# Altium PCB USB_IsolatorPCB.PcbDoc
Units mm, origin at the board's own origin, x right, y up, seen from the top; angles counter-clockwise.
Board outline 52.71 x 63.5 mm, 2 copper layers (Top Layer, Bottom Layer); 21 components, 16 nets, 82 pads, 26 vias.
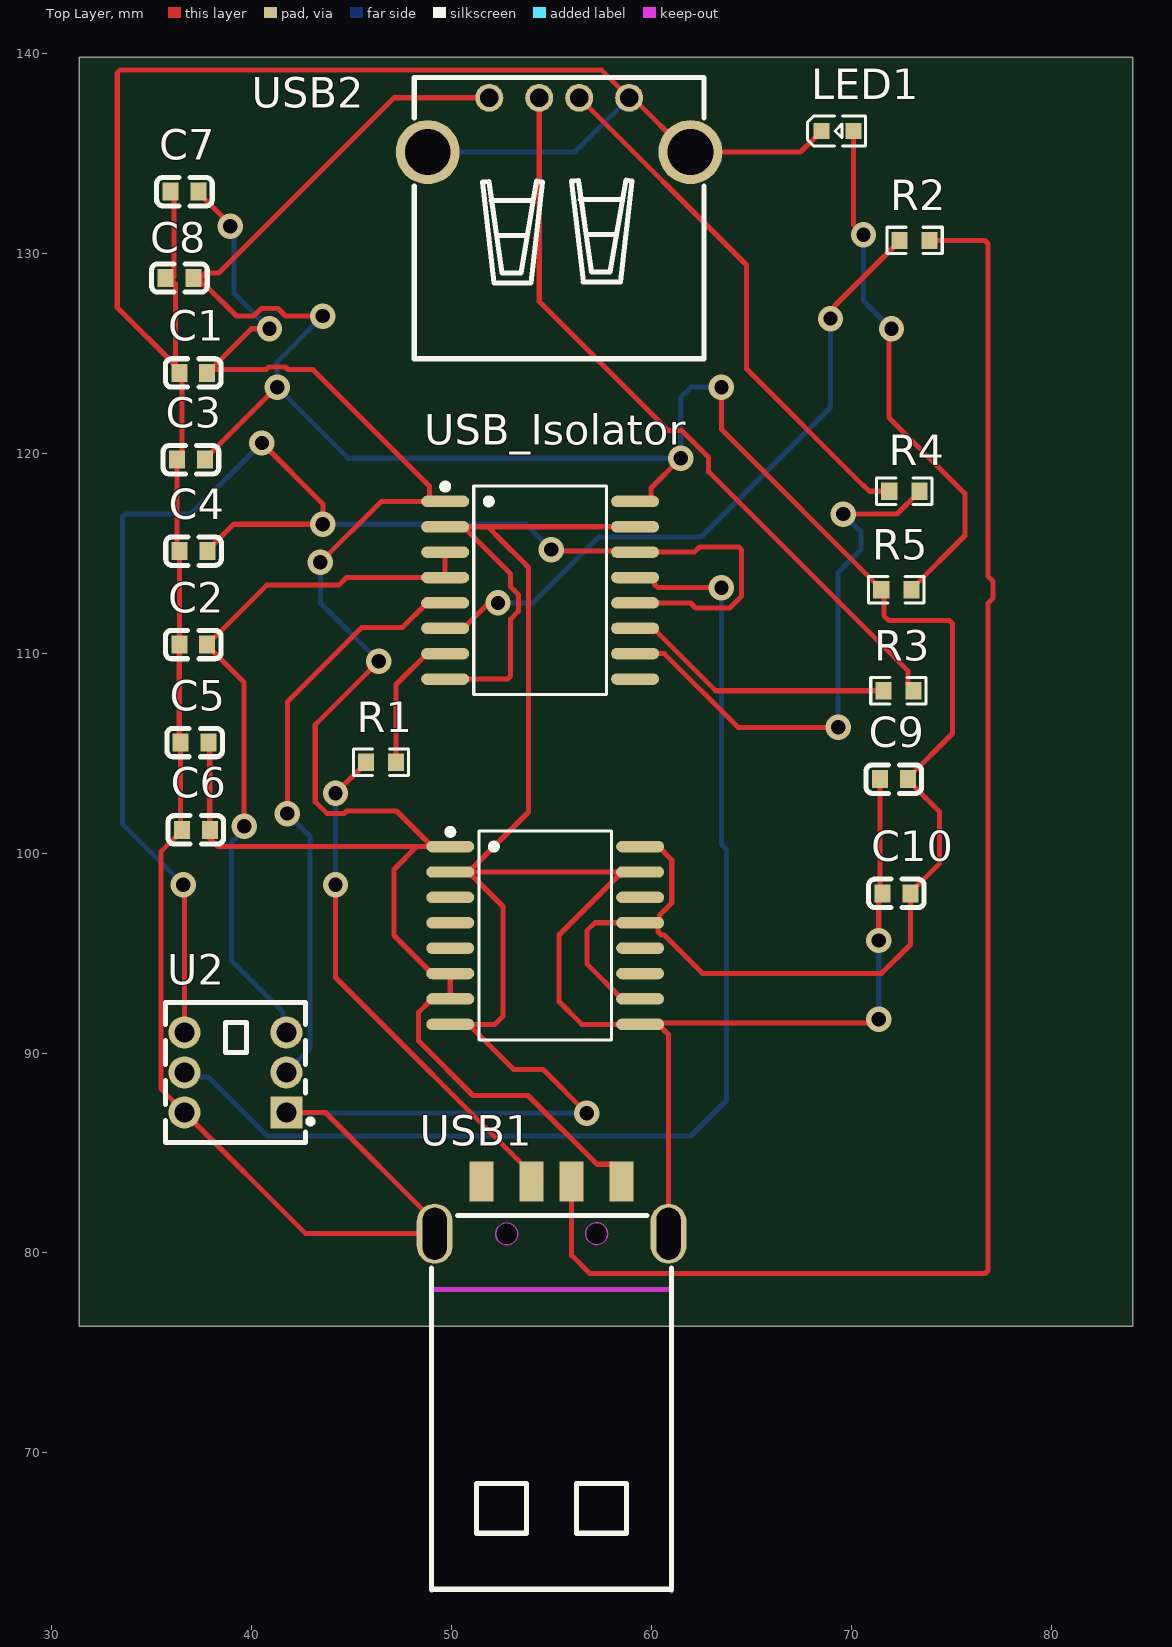
[diagram p0: Top Layer view]
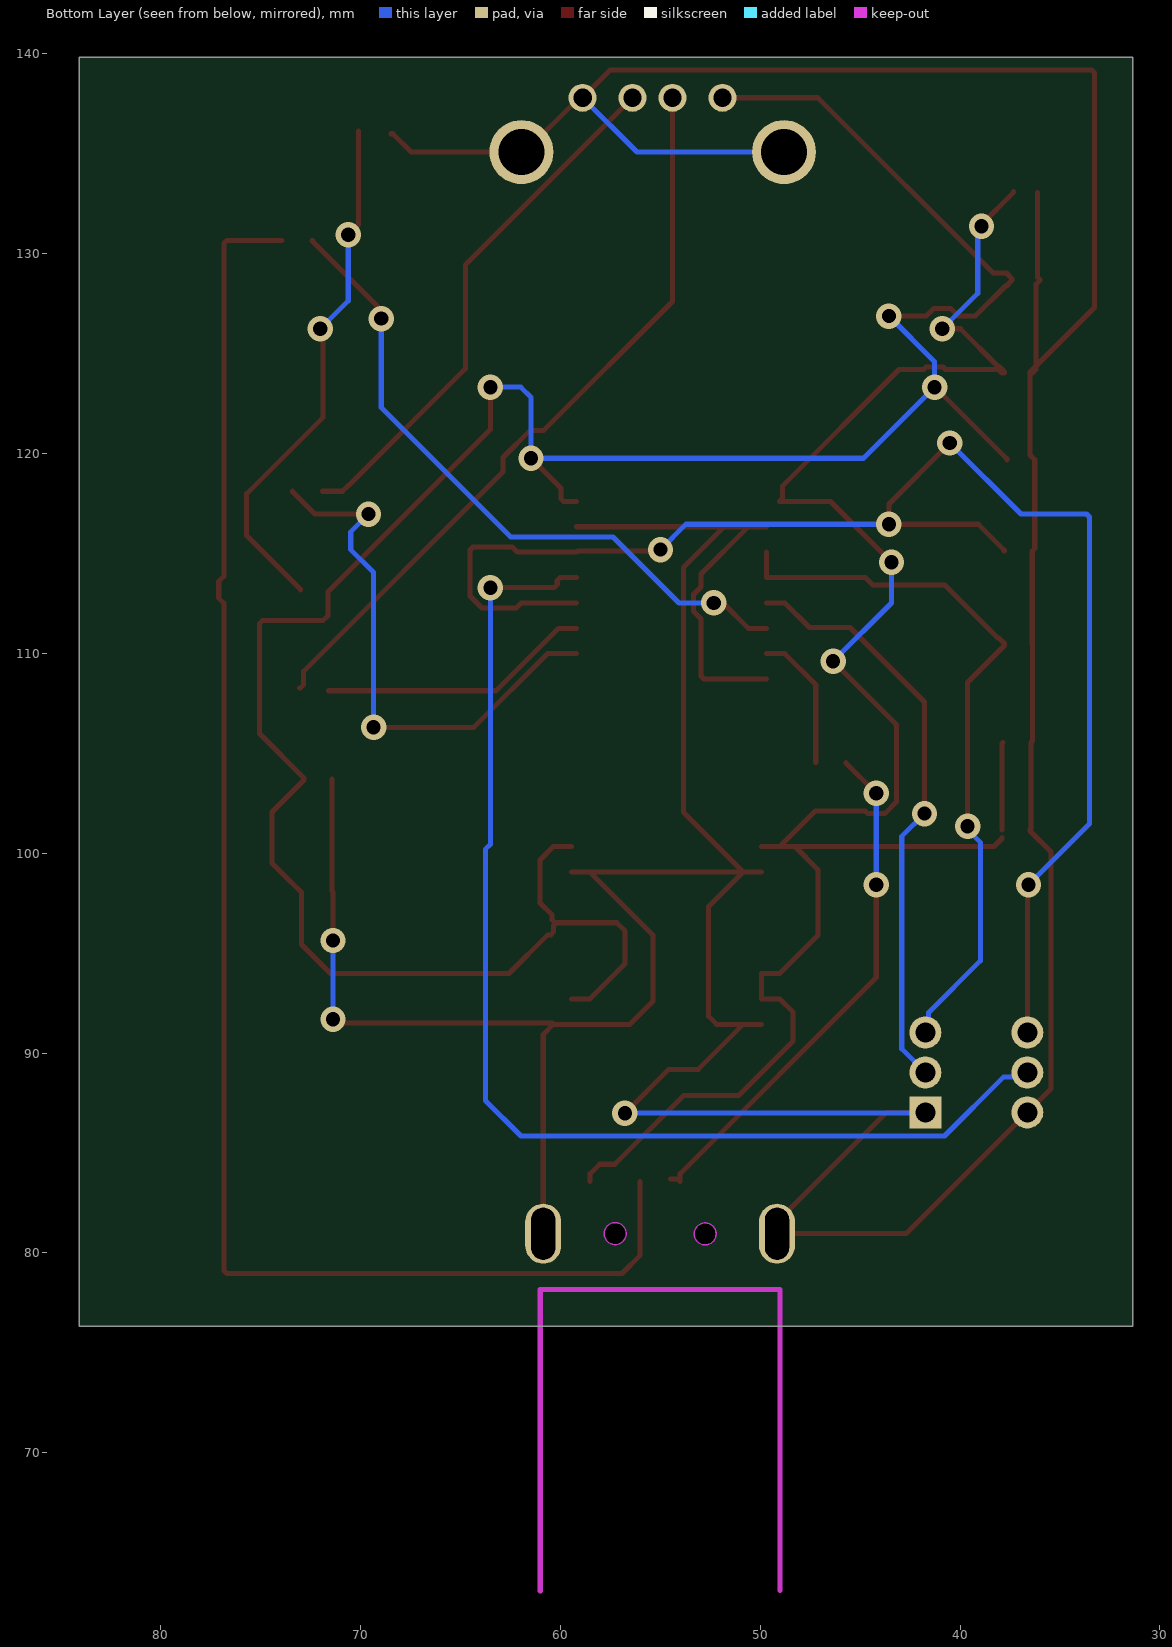
[diagram p1: Bottom Layer view, seen from below]
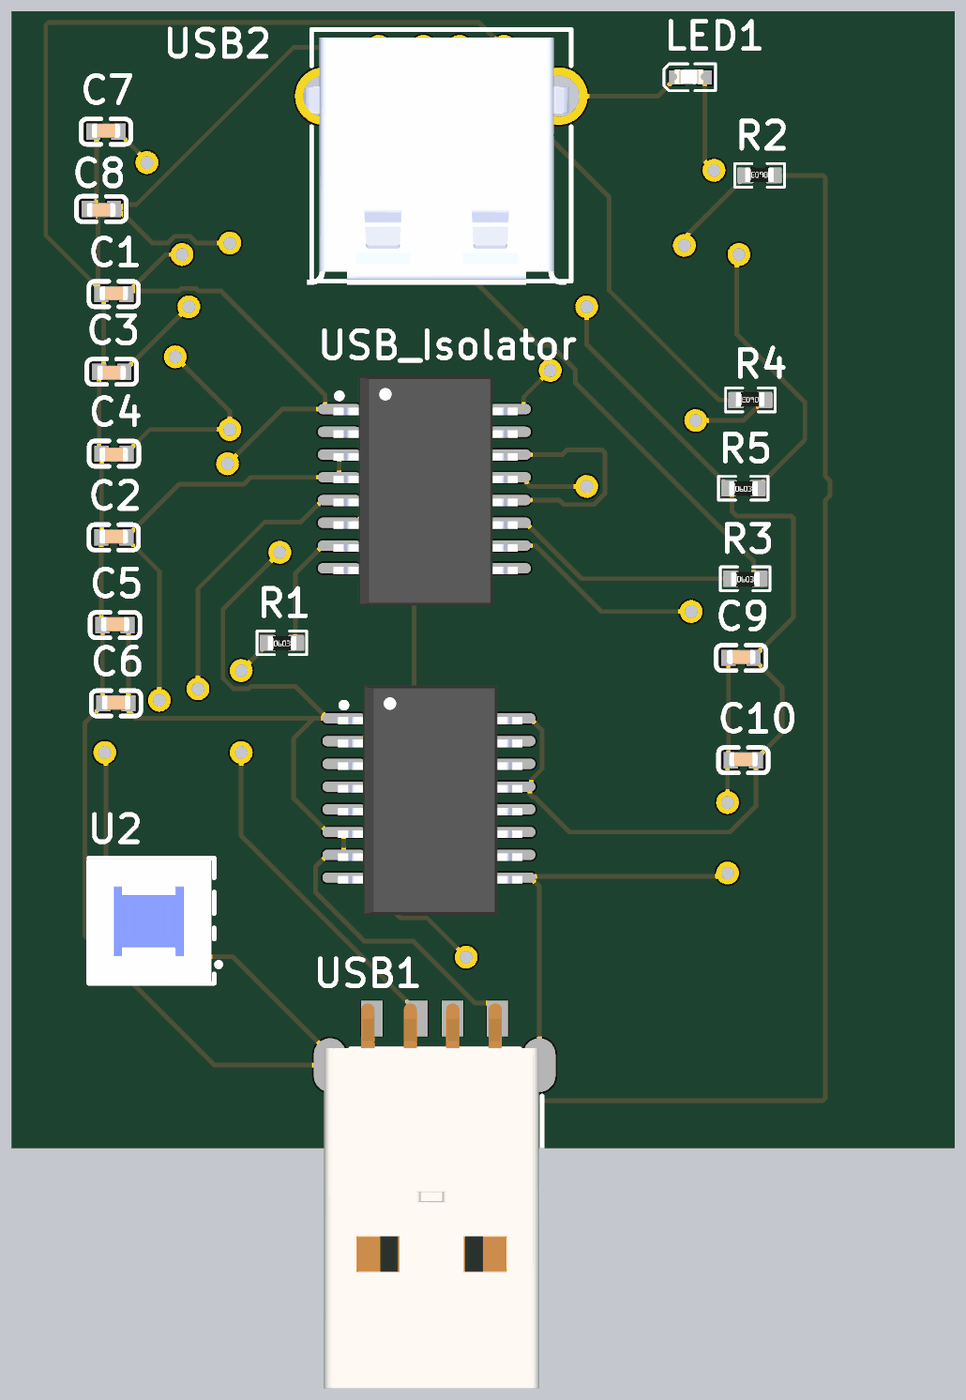
[diagram p2: 3D render of the assembled board from above, using the file's embedded part models]

## Layer stack, top to bottom
Top Solder: solder mask 0.0102, Solder Resist, Dk 3.5
Top Layer: signal copper 0.0356
Dielectric 1: dielectric 0.32, FR-4, Dk 4.8
Bottom Layer: signal copper 0.0356
Bottom Solder: solder mask 0.0102, Solder Resist, Dk 3.5

## Board outline
31.369,76.327 31.369,139.827 84.074,139.827 84.074,76.327

## Design rules (kind name [scope] priority, off if disabled: settings)
Clearance [All] p1: gap=0.254 ignorepadtopadclearanceinfootprint=FALSE
PolygonConnect [All] p1: connectstyle=Relief reliefconductorwidth=0.254 reliefentries=4 polygonreliefangle="90 Angle" airgapwidth=0.254
RoutingVias [All] p1: holewidth=0.711 width=1.27 viastyle="Through Hole" minholewidth=0.711 minwidth=1.27 maxholewidth=0.711 maxwidth=1.27
SolderMaskExpansion [All] p1: expansion=0.102 istentingtop=FALSE
SupplyNets "Schematic Supply Nets_2" [InNet('VCC')] p1: voltage=0.000
SupplyNets "Schematic Supply Nets_1" [InNet('AVCC')] p2: voltage=0.000
SupplyNets "Schematic Supply Nets" [InNet('AGND')] p3: voltage=0.000
Width [All] p1: maxlimit=0.254 minlimit=0.254 preferedwidth=0.254
30 further rules are at their usual default settings.

## Classes and differential pairs
component class USB_Isolator: C1 C2 C3 C5 C6 C7 C8 C9 C10 LED1 R1 R2 R3 R5 U2 USB2

## Components (designator, comment, footprint, x,y, rotation, side; value= is the part's Value field where it differs from the comment)
C1 "100nF" 100uF 37.084,124.079 r0 top
C2 "100nF" 100uF 37.084,110.49 r0 top
C3 "100nF" 100uF 36.957,119.634 r180 top
C4 "100nF" 100uF 37.084,115.062 r180 top
C5 "100nF" 100uF 37.156,105.589 r0 top
C6 "100nF" 100uF 37.211,101.219 r0 top
C7 "100nF" 100uF 36.645,133.148 r0 top
C8 "100nF" 100uF 36.38,128.726 r180 top
C9 "100nF" 100uF 72.136,103.759 r0 top
C10 "100nF" 100uF 72.263,98.044 r0 top
LED1 "XL-1608SURC-06" LED 69.342,136.144 r0 top
R1 "10Ω" 100K 46.482,104.521 r0 top
R2 "10Ω" 100K 73.152,130.683 r180 top
R3 "10Ω" 100K 72.369,108.103 r0 top
R4 "10Ω" 100K 72.641,118.136 r180 top
R5 "10Ω" 100K 72.263,113.157 r0 top
U2 "KFC7070-Z" Switch 39.116,89.027 r0 top
U? "ADUM4160BRWZ-RL" "USB ISOLATOR" 49.935,100.33 r270 top
USB1 "480372100" "USB MALE" 58.508,83.693 r0 top (schematic designator USB?)
USB2 "UE27AC54100" "USB TYPE- A" 51.887,137.795 r0 top
USB_Isolator "ADUM4160BRWZ-RL" "USB ISOLATOR" 49.681,117.602 r270 top

## Footprints (in the part's own frame and the unit in brackets; to place one, negate y for a bottom-side part, rotate by r counter-clockwise, add the part's x,y. Pads: shape width x height; smd on the part's side, far side on the other; paste and mask are expansions set on the pad)
100K [mm]
  rect 0.806x0.864 smd paste-100 mask+0.051: 1(-0.765,0.026) 2(0.741,0.026)
  silkscreen extent -1.4,-0.64 1.37,0.69, body extent -0.8,-0.4 0.8,0.4, height 0.47
100uF [mm]
  rect 0.8x0.9 smd: 1(-0.707,-0.052) 2(0.693,-0.052)
  silkscreen extent -1.4,-0.76 1.38,0.66, body extent -0.8,-0.4 0.8,0.4, height 0.8
LED [mm]
  rect 0.8x0.8 smd: 1(-0.834,-0.02) 2(0.765,-0.013)
  silkscreen extent -1.52,-0.76 1.36,0.74, body extent -0.94,-0.38 0.68,0.42, height 0.63
Switch [mm]
  rect 1.6x1.6 hole 1 paste-2539.97 mask+0.05: 1(2.621,-1.996)
  round 1.6 hole 1 paste-2539.97 mask+0.05: 2(2.621,0.004) 3(2.621,2.004) 4(-2.479,-1.996) 5(-2.479,0.004) 6(-2.479,2.004)
  silkscreen extent -3.43,-3.5 3.95,3.5, body extent -3.59,-3.53 3.41,3.47, height 12.4
"USB ISOLATOR" [mm]
  oval 0.574x2.401 smd: 1(0,0) 2(1.27,0) 3(2.54,0) 4(3.81,0) 5(5.08,0) 6(6.35,0) 7(7.62,0) 8(8.89,0) 9(8.89,9.501) 10(7.62,9.501) 11(6.35,9.501) 12(5.08,9.501) 13(3.81,9.501) 14(2.54,9.501) 15(1.27,9.501) 16(0,9.501)
  silkscreen extent -0.89,-0.15 9.67,8.07, body extent -1.83,-0.32 10.97,9.98, height 2.64
"USB MALE" [mm]
  rect 1.2x2 smd paste-100 mask+0.051: 1(0,-0.127) 2(-2.501,-0.127) 3(-4.5,-0.127) 4(-7,-0.127)
  oval 1.8x3 hole 1.2 slot 2.6 at 90 deg: 5(-9.35,-2.727) 6(2.349,-2.727)
  Keep-Out Layer board cut-out: -0.7,-2.726 -0.755,-2.965 -0.908,-3.156 -1.128,-3.263 -1.373,-3.263 -1.593,-3.156 -1.746,-2.965 -1.8,-2.726 -1.8,-2.726 -1.746,-2.488 -1.593,-2.296 -1.373,-2.19 -1.128,-2.19 -0.908,-2.296 -0.755,-2.488 -0.7,-2.726
  Keep-Out Layer board cut-out: -5.2,-2.739 -5.255,-2.978 -5.407,-3.169 -5.628,-3.276 -5.873,-3.276 -6.093,-3.169 -6.246,-2.978 -6.3,-2.739 -6.3,-2.739 -6.246,-2.501 -6.093,-2.309 -5.873,-2.203 -5.628,-2.203 -5.407,-2.309 -5.255,-2.501 -5.2,-2.739
  Keep-Out Layer circle w0.025: c-1.25,-2.726 r0.55
  Keep-Out Layer circle w0.025: c-5.75,-2.739 r0.55
  Keep-Out Layer region: -0.7,-2.726 -0.755,-2.965 -0.908,-3.156 -1.128,-3.263 -1.373,-3.263 -1.593,-3.156 -1.746,-2.965 -1.8,-2.726 -1.8,-2.726 -1.746,-2.488 -1.593,-2.296 -1.373,-2.19 -1.128,-2.19 -0.908,-2.296 -0.755,-2.488 -0.7,-2.726
  Keep-Out Layer region: -5.2,-2.739 -5.255,-2.978 -5.407,-3.169 -5.628,-3.276 -5.873,-3.276 -6.093,-3.169 -6.246,-2.978 -6.3,-2.739 -6.3,-2.739 -6.246,-2.501 -6.093,-2.309 -5.873,-2.203 -5.628,-2.203 -5.407,-2.309 -5.255,-2.501 -5.2,-2.739
  Keep-Out Layer lines w0.254: -9.5,-5.521 2.5,-5.521 ; -9.5,-5.521 -9.5,-20.587 -9.5,-5.521 ; -9.5,-5.521 2.5,-5.521 ; 2.5,-5.521 2.5,-20.597 2.5,-5.521
  silkscreen extent -9.5,-20.52 2.5,-1.82, body extent -9.89,-20.78 2.54,0.72, height 4.55
"USB TYPE- A" [mm]
  round 1.4 hole 0.92: 1(0,0) 2(2.499,0) 3(4.501,0) 4(7,0)
  round 3.2 hole 2.3: 5(-3.078,-2.718) 5(10.063,-2.718)
  silkscreen extent -3.76,-13.06 10.75,1.01, body extent -4.19,-13.25 10.66,0.55, height 7.2

## Part data
C1 C2 C3 C4 C5 C6 C7 C8 C9 C10: library part 10uF, JLCPCB Part Class="Extended Part", Manufacturer=SAMSUNG(三星), Manufacturer Part=CL10B104KO8NNNC, nameAlias=Value, spicePre=C, spiceSymbolName=CL10B104KO8NNNC, Supplier=LCSC, Supplier Part=C66501
LED1: library part LED, Color Temperature=-, Forward Current=20mA, Illumination Color=Red, JLCPCB Part Class="Extended Part", Lens Color="Colorless Transparent Lens", Manufacturer=XINGLIGHT(成兴光), Operating Temperature=-20℃~+85℃, Power(Watts)=50mW, Voltage - Forward(Vf)=2.3V, Add into BOM=yes, Convert to PCB=yes, Datasheet=https://atta.szlcsc.com/upload/public/pdf/source/20250213/F9766CE804AF391355DCDD48DB3E0DAB.pdf, Device=XL-1608SURC-06, Diode Configuration=-, Lamp Holder Type=-, LCSC Part Name=XL-1608SURC-06, Luminous Intensity=225mcd, Manufacturer Part=XL-1608SURC-06, Mounting Sytle="Positive Stick", Peak Wavelength=625nm, Supplier=LCSC, Supplier Footprint=0603, Supplier Part=C965799, Symbol=XL-1608SURC-06, Viewing Angle=120°, Wavelength - Dominant=620nm~630nm
R1 R2 R3 R4 R5: library part 10k, JLCPCB Part Class="Extended Part", LCSC Part Name="厚膜电阻 10Ω ±1% 100mW", Manufacturer=YAGEO(国巨), Manufacturer Part=RC0603FR-0710RL, Operating Temperature Range=-55℃~+155℃, Temperature Coefficient=±200ppm/℃, Tolerance=±1%, Add into BOM=yes, Convert to PCB=yes, Datasheet=https://atta.szlcsc.com/upload/public/pdf/source/20180316/70C0E2BDAE7FCC62C531A5A58D202EE1.pdf, Device=RC0603FR-0710RL, Supplier=LCSC, Supplier Footprint=0603, Supplier Part=C109318, Symbol=RC0603FR-0710RL, Type="Thick Film Resistors"
U2: library part switch, JLCPCB Part Class="Extended Part", Manufacturer=HanElectricity(瀚源), Add into BOM=yes, Convert to PCB=yes, Datasheet=https://atta.szlcsc.com/upload/public/pdf/source/20240605/2F47BAB787CC6253D9F5B83C0B3B0039.pdf, Device=KFC7070-Z, LCSC Part Name=KFC7070-Z, Manufacturer Part=KFC7070-Z, Supplier=LCSC, Supplier Footprint=DIP-6P,7x7mm, Supplier Part=C22459508, Symbol=KFC7070-Z
U?: library part "DC TO DC", JLCPCB Part Class="Extended Part", LCSC Part Name=全速/低速5kVUSB数字隔离器, Manufacturer=ADI(亚德诺), Add into BOM=yes, Convert to PCB=yes, Datasheet=https://atta.szlcsc.com/upload/public/pdf/source/20180327/C57791_1A1DC0BD2A9501538E79ECF10A1F69DF.pdf, Device=ADUM4160BRWZ-RL_C57791, Manufacturer Part=ADUM4160BRWZ-RL, Supplier=LCSC, Supplier Footprint=SOIC-16-300mil, Supplier Part=C57791, Symbol=ADUM4160BRWZ
USB1: library part "USB MALE", JLCPCB Part Class="Extended Part", LCSC Part Name="Type-A 公", Manufacturer=MOLEX, Add into BOM=yes, Connector Type=Type-A, Convert to PCB=yes, Datasheet=https://www.molex.com/content/dam/molex/molex-dot-com/products/automated/en-us/salesdrawingpdf/480/48037/480372100_sd.pdf?inline, Device=480372100, Gender=Male, Manufacturer Part=480372100, Number of Contacts=4P, Number of Ports=1, Protocol Standard="USB 2.0", Supplier=LCSC, Supplier Footprint=SMD, Supplier Part=C136453, Symbol=48037-2100
USB2: Current Rating - Power (Max)=-, JLCPCB Part Class="Extended Part", LCSC Part Name="Type-A 母 弯插", Manufacturer=Amphenol, Operating Temperature Range=-40℃~+85℃, Add into BOM=yes, Connector Type=Type-A, Convert to PCB=yes, Datasheet=https://atta.szlcsc.com/upload/public/pdf/source/20191127/C464564_498EB86BBE5CA23622B07688CAA735B5.pdf, Device=UE27AC54100, Gender=Female, Manufacturer Part=UE27AC54100, Mounting Style=Right-Angle, Number of Contacts=4P, Number of Ports=1, Standard="USB 2.0", Supplier=LCSC, Supplier Footprint=插件, Supplier Part=C464564, Symbol=UE27AC54100
USB_Isolator: library part ADUM4160BRWZ-RL_C57791, JLCPCB Part Class="Extended Part", LCSC Part Name=全速/低速5kVUSB数字隔离器, Manufacturer=ADI(亚德诺), Add into BOM=yes, Convert to PCB=yes, Datasheet=https://atta.szlcsc.com/upload/public/pdf/source/20180327/C57791_1A1DC0BD2A9501538E79ECF10A1F69DF.pdf, Device=ADUM4160BRWZ-RL_C57791, Manufacturer Part=ADUM4160BRWZ-RL, Supplier=LCSC, Supplier Footprint=SOIC-16-300mil, Supplier Part=C57791, Symbol=ADUM4160BRWZ

## Via types
v1: diameter 1.27, hole 0.711, Top Layer to Bottom Layer, 26 vias

## Nets (pads, with @x,y where several pads share a name; then routed paths per layer and width w, separated by ;. In a path a pad name is that pad's centre, name@x,y a point inside that pad or via, vN(x,y) a via of type N, cw(c..) or ccw(c..) an arc to the next point about the centre after c; other vN are vias at no path point)
AGND: C1.1 C2.1 C3.2 C4.2 C5.1 C6.1 C7.1 C8.2 C9.1 C10.1 LED1.1 U2.1 U2.4 U?.2 U?.8 U?.9 U?.15 USB1.5 USB1.6 USB2.4 USB2.5 USB_Isolator.2 USB_Isolator.8 USB_Isolator.15 | length 268.4
  Top Layer w0.254: C8.2@36.01,128.653 36.195,128.468 C1.1@36.195,124.209 ; C8.2@36.01,128.703 36.123,128.816 C7.1@36.123,133.044 ; C1.1@36.288,124.116 C1.1 ; C1.1@36.377,124.204 36.284,124.297 33.274,127.307 33.274,139.043 33.423,139.192 57.49,139.192 USB2.4 59.06,137.795 61.778,135.077 61.951,135.077 67.461,135.077 68.38,135.996 LED1.1@68.474,135.996 ; C1.1@36.465,124.116 36.504,124.077 36.504,124.027 36.504,119.926 C3.2 36.264,115.241 C4.2 36.391,110.452 C2.1 36.377,105.609 C5.1 36.449,101.222 C6.1 36.504,101.117 35.456,100.069 35.456,88.212 U2.4 42.702,80.966 USB1.5 49.157,81.566 43.693,87.031 U2.1 ; USB_Isolator.8 52.81,108.712 52.959,108.861 52.959,111.72 53.34,112.101 53.34,112.943 52.959,113.324 52.959,113.968 USB_Isolator.2@50.595,116.332 ; USB_Isolator.2 USB_Isolator.2@50.595,116.332 ; U?.8 U?.8@50.849,91.44 ; U?.2 U?.2@50.849,99.06 ; v1(56.769,86.995) 54.577,89.187 53.102,89.187 U?.8@50.849,91.44 ; USB_Isolator.15 51.816,116.332 ; U?.15 U?.15@58.523,99.06 ; USB1.6 60.857,90.932 U?.9@60.349,91.44 ; v1(71.374,91.694) 71.181,91.501 60.41,91.501 U?.9@60.349,91.44 ; v1(71.374,95.631) 71.374,98.064 71.429,98.119 C9.1 ; USB_Isolator.2@50.595,116.332 51.816,116.332 ; U?.8@50.849,91.44 52.175,91.44 52.578,91.843 52.578,97.331 U?.2@50.849,99.06 ; U?.2@50.849,99.06 53.848,102.059 53.848,114.3 53.594,114.554 52.578,115.57 51.816,116.332 ; U?.2@50.849,99.06 U?.15@58.523,99.06 ; U?.15@58.523,99.06 55.372,95.909 55.372,92.583 56.515,91.44 U?.9 U?.9@60.349,91.44
  Bottom Layer w0.254: U2.1 41.773,86.995 v1(56.769,86.995) ; USB2.5@48.809,135.077 56.17,135.077 USB2.4 ; v1(71.374,91.694) v1(71.374,95.631)
AVCC: C3.1 C8.1 C9.2 C10.2 R5.1 U?.10 U?.13 U?.16 USB2.1 USB_Isolator.16 | length 130.8
  Top Layer w0.254: C8.1@37.41,128.703 37.41,128.653 37.683,128.38 37.733,128.38 39.24,126.873 40.092,126.873 40.473,127.254 41.315,127.254 41.696,126.873 v1(43.561,126.873) ; C8.1@37.41,128.753 37.683,129.026 38.348,129.026 47.117,137.795 USB2.1 ; C3.1 37.664,119.736 41.245,123.317 v1(41.275,123.317) ; USB_Isolator.16 59.829,117.602 59.977,117.75 59.977,118.27 v1(61.468,119.761) ; U?.10 58.523,92.71 56.769,94.464 56.769,96.117 57.172,96.52 U?.13 U?.13@60.185,96.52 ; U?.16 60.349,100.33 61.017,99.662 61.017,97.513 60.41,96.907 60.41,96.668 60.263,96.52 U?.13@60.185,96.52 ; v1(63.5,123.317) 63.5,121.209 71.628,113.081 71.628,111.887 71.882,111.633 74.908,111.633 75.057,111.484 75.057,105.985 72.829,103.757 C9.2 72.829,103.657 74.422,102.064 74.422,99.498 73.451,98.527 73.44,98.527 72.956,98.042 C10.2 72.956,95.435 71.501,93.98 62.564,93.98 60.626,95.918 60.482,95.918 60.333,96.067 60.333,96.372 U?.13@60.185,96.52
  Bottom Layer w0.254: v1(43.561,126.873) 41.275,124.587 v1(41.275,123.317) 44.831,119.761 v1(61.468,119.761) 61.468,122.809 61.976,123.317 v1(63.5,123.317)
NetLED1_2: LED1.2 R5.2 | length 26.5
  Top Layer w0.254: LED1.2 70.107,131.442 v1(70.612,130.937) ; v1(72.009,126.238) 71.882,126.111 71.882,121.793 75.692,117.983 75.692,115.899 73.004,113.211 R5.2
  Bottom Layer w0.254: v1(70.612,130.937) 70.612,127.635 v1(72.009,126.238)
NetR1_1: R1.1 USB1.3 | length 26.2
  Top Layer w0.254: v1(44.196,98.425) 44.196,93.778 54.008,83.966 USB1.3 54.135,83.693 USB1.3@54.483,83.693 ; v1(44.196,102.997) 45.717,104.518 R1.1
  Bottom Layer w0.254: v1(44.196,98.425) v1(44.196,102.997)
NetR1_2: R1.2 USB_Isolator.7 | length 7
  Top Layer w0.254: R1.2 47.223,108.437 48.768,109.982 USB_Isolator.7
NetR2_1: R2.1 USB1.2 | length 79.5
  Top Layer w0.254: USB1.2 56.007,79.883 56.918,78.972 76.686,78.972 76.835,79.121 76.835,112.508 77.089,112.762 77.089,113.603 76.835,113.857 76.835,130.509 76.686,130.657 R2.1
NetR2_2: R2.2 USB_Isolator.6 | length 33.6
  Top Layer w0.254: USB_Isolator.6 50.595,111.252 51.865,112.522 v1(52.324,112.522) ; v1(68.961,126.746) 69.155,126.94 69.155,127.373 72.411,130.629 R2.2
  Bottom Layer w0.254: v1(52.324,112.522) 54.062,112.522 57.364,115.824 62.484,115.824 68.961,122.301 v1(68.961,126.746)
NetR3_1: R3.1 USB_Isolator.11 | length 13.7
  Top Layer w0.254: USB_Isolator.11 60.095,111.252 63.219,108.128 R3.1
NetR3_2: R3.2 USB2.2 | length 37.7
  Top Layer w0.254: USB2.2 54.386,127.605 60.833,121.158 61.508,121.158 62.865,119.801 62.865,119.086 72.843,109.108 72.843,108.433 73.017,108.259 R3.2@73.037,108.259
NetR4_1: R4.1 USB_Isolator.10 | length 27.5
  Top Layer w0.254: USB_Isolator.10 60.647,109.982 64.33,106.299 v1(69.342,106.299) ; v1(69.596,116.967) 72.292,116.967 73.406,118.081 R4.1
  Bottom Layer w0.254: v1(69.342,106.299) 69.342,114.046 70.485,115.189 70.485,116.078 v1(69.596,116.967)
NetR4_2: R4.2 USB2.3 | length 26.7
  Top Layer w0.254: USB2.3 64.753,129.43 64.753,124.236 70.599,118.389 70.628,118.389 70.907,118.11 R4.2
SPD: U2.5 USB_Isolator.13 | length 59.6
  Top Layer w0.254: USB_Isolator.13 60.009,113.792 60.156,113.644 60.156,113.449 60.322,113.284 v1(63.5,113.284)
  Bottom Layer w0.254: U2.5 36.857,88.811 37.818,88.811 40.779,85.85 61.974,85.85 63.754,87.63 63.754,100.193 63.5,100.447 v1(63.5,113.284)
SPU: U2.2 USB_Isolator.5 | length 29.4
  Top Layer w0.254: v1(41.783,101.981) 41.783,107.569 45.503,111.289 47.535,111.289 48.768,112.522 USB_Isolator.5
  Bottom Layer w0.254: U2.2 42.918,90.212 42.918,100.846 v1(41.783,101.981)
VCC: C1.2 C5.2 C6.2 C7.2 U?.1 U?.6 U?.7 USB1.1 USB_Isolator.1 | length 98
  Top Layer w0.254: C7.2 37.338,133.046 38.931,131.453 v1(38.931,131.37) ; C1.2 37.777,124.077 38.05,124.35 38.1,124.35 39.988,126.238 v1(40.894,126.238) ; C5.2 37.904,105.482 C6.2 ; C6.2@37.904,100.786 37.904,100.736 38.31,100.33 48.26,100.33 ; C1.2@37.904,124.027 38.083,124.206 40.727,124.206 40.854,124.333 41.696,124.333 41.823,124.206 43.053,124.206 48.895,118.364 48.895,117.75 49.043,117.602 46.482,117.602 v1(43.434,114.554) ; v1(46.355,109.601) 43.18,106.426 43.18,102.576 43.775,101.981 44.617,101.981 44.744,102.108 47.244,102.108 U?.1@49.022,100.33 ; U?.1 U?.1@49.022,100.33 ; USB1.1 58.508,83.966 58.035,84.439 57.273,84.439 53.828,87.884 51.076,87.884 48.354,90.606 48.354,92.042 49.022,92.71 U?.7 U?.6 49.022,93.98 47.117,95.885 47.117,99.187 48.26,100.33 ; 48.26,100.33 U?.1@49.022,100.33
  Bottom Layer w0.254: v1@39.116,131.318 39.116,128.016 v1(40.894,126.238) ; v1(43.434,114.554) 43.434,112.522 v1(46.355,109.601)
VDD1: C2.2 U2.3 USB_Isolator.3 USB_Isolator.4 | length 36.1
  Top Layer w0.254: C2.2 37.777,110.388 39.624,108.541 v1(39.624,101.346) ; C2.2@37.777,110.488 38.05,110.761 38.1,110.761 40.75,113.411 44.363,113.411 44.744,113.792 USB_Isolator.4 USB_Isolator.3
  Bottom Layer w0.254: v1(39.624,101.346) 39.624,101.179 38.989,100.544 38.989,94.615 41.574,92.03 41.574,91.194 U2.3
VDD2: C4.1 U2.6 USB_Isolator.12 USB_Isolator.14 | length 77
  Top Layer w0.254: v1(36.576,98.425) 36.637,98.364 U2.6 ; C4.1 37.791,115.164 39.086,116.459 v1(43.561,116.459) 43.561,117.475 v1(40.513,120.523) ; v1(54.991,115.189) 55.057,115.123 59.121,115.123 USB_Isolator.14 62.148,115.062 62.402,115.316 64.367,115.316 64.516,115.167 64.516,112.863 63.921,112.268 62.209,112.268 61.955,112.522 USB_Isolator.12
  Bottom Layer w0.254: v1(36.576,98.425) 33.528,101.473 33.528,116.818 33.677,116.967 36.957,116.967 v1(40.513,120.523) ; v1(43.561,116.459) 53.721,116.459 v1(54.991,115.189)
pads on no net: U?.3 U?.4 U?.5 U?.11 U?.12 U?.14 USB1.4 USB_Isolator.9

## Polygon pours and split planes (outlines as drawn)
AGND on Mechanical 1 (solid): 31.369,139.827 31.369,76.327 84.201,76.327 84.328,76.454 84.074,76.708 84.074,139.827

## Silkscreen, mask and mechanical layers (free items; w line width, h text height)
Mechanical 1:
  lines w0.254: 84.074,76.327 84.074,139.827 31.369,139.827 31.369,76.327 54.991,76.327 84.201,76.327